# EAGLE board working (EAGLE 8.2.2)
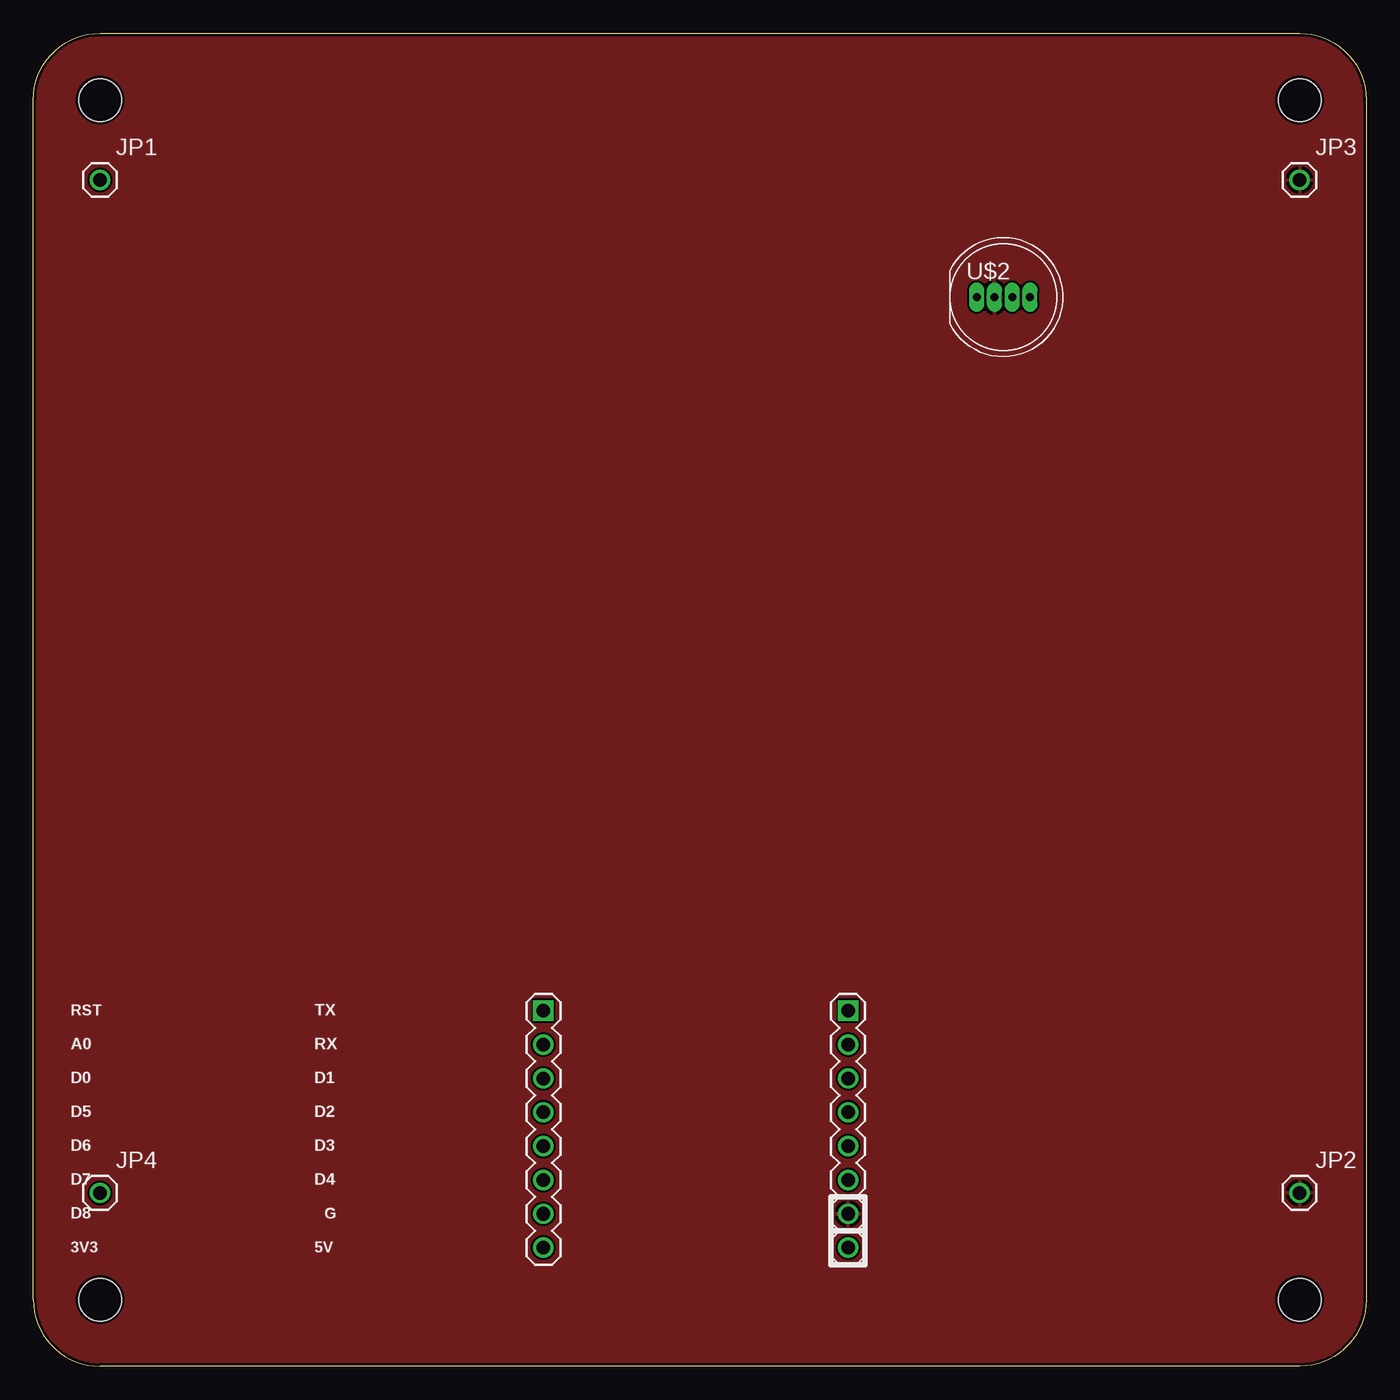
[diagram p0: board, top side]
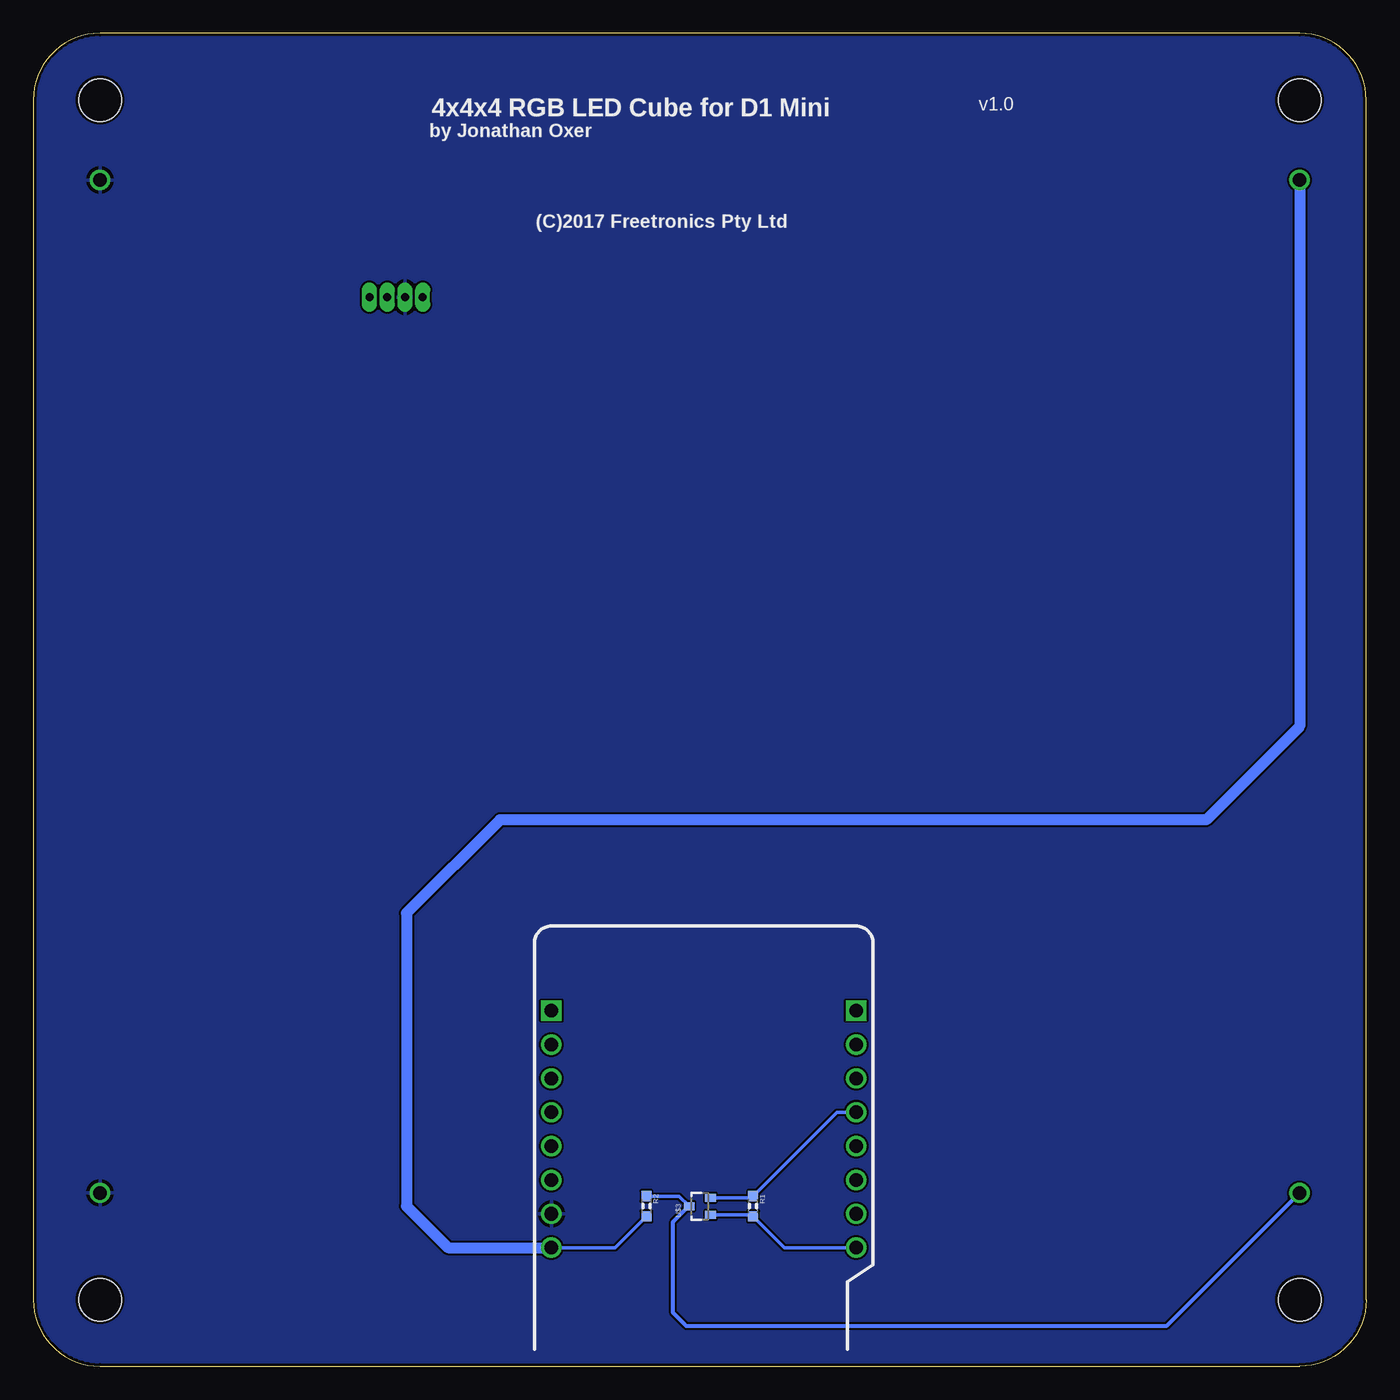
[diagram p1: board, bottom side, seen from below]

Size 100 x 100 mm. Coordinates in mm from the lower left corner, seen from the top.
Outline: 100,95 100,5 arc-90 95,0 5,0 arc-90 0,5 0,95 arc-90 5,100 95,100 arc-90 100,95
Copper layers (1*16): Top 0.035mm / dielectric 1.5mm / Bottom 0.035mm
Design rules "ElectroDragon_2layer_DRU_no_angle_20140221": minimum track width 6mil, minimum drill 12mil, track to track 6mil, track to pad 6mil, pad to pad 6mil, via to via 6mil, smd to smd 6mil, copper to edge 8mil, drill to drill 6mil, minimum pad ring 10mil, minimum via ring 6mil, stop-mask expansion 4mil, vias tented up to drill 100mil, thermal gap 10mil
Net classes: 0 default: width 0.203 mm, drill 0.356 mm, clearance 0.152 mm; 1 power: width 0.203 mm, clearance 0.152 mm
Holes 3.2 mm at 5,95 95,95 95,5 5,5

## Footprints (pad centres in the part's own frame; a part is rotated, then mirrored left to right if it is on the bottom)
1X08 = drill 1.016 square: 1 0,0 | drill 1.016: 2 2.54,0; 3 5.08,0; 4 7.62,0; 5 10.16,0; 6 12.7,0; 7 15.24,0; 8 17.78,0
1X01 = drill 1.016: 1 0,0
0603 = smd 0.762 x 0.762: 1 -0.762,0; 2 0.762,0
LED8MMRGB = drill 0.6 long: 1 -2,0; 2 -0.66,0; 3 0.66,0; 4 2,0
SOT32-3 = smd 0.6 x 0.8: 1 -0.65,-0.8; 2 0.65,-0.8; 3 0,0.8

## Placement (x,y rotation side)
H1  [1X08]  38.27,26.67 270 top
H2  [1X08]  61.13,26.67 270 top
JP1  M01PTH  [1X01]  5,89 0 top
JP2  M01PTH  [1X01]  95,13 0 top
JP3  M01PTH  [1X01]  95,89 0 top
JP4  M01PTH  [1X01]  5,13 0 top
R1  10k  [0603]  46,12 270 bottom
R2  10k  [0603]  54,12 270 bottom
U$2  APA106F8  [LED8MMRGB]  72.78,80.21 0 top
U$3  RJU003N03  [SOT32-3]  50,12 90 bottom

## Library data of the parts
H1 H2 = freetronics-original
JP1-JP4 = freetronics-master-v1.1
R1 R2 U$2 U$3 = freetronics-jon

## Nets
3.3V: H1.8 R1.2 U$3.1
5V: H2.8 JP1.1 R2.2
A0: H1.2
D0: H1.3
D1: H2.3
D2: H2.4
D3: H2.5
D4: H2.6
D5: H1.4 R1.1 U$3.2
D6: H1.5
D7: H1.6
D8: H1.7
DATA: JP4.1 R2.1 U$3.3
GND: H2.7 JP2.1 JP3.1 U$2.2
RST: H1.1
RX: H2.2
TX: H2.1
VDD: U$2.3

## Tracks (layer width: path | path; a pad name or v marks a point on that pad's centre or on a via)
3.3V
  Bottom 0.254: U$3.1 46.11,11.35 R1.2 43.65,8.89 H1.8
5V
  Bottom 0.254: R2.2 56.35,8.89 H2.8
  Bottom 0.813: JP1.1 5,48 12,41 65,41 72,34 72,12 68.89,8.89 H2.8
D5
  Bottom 0.254: U$3.2 46.11,12.65 R1.1 39.71,19.05 H1.4
DATA
  Bottom 0.254: U$3.3 50.81,12.01 51.56,12.76 R2.1
  Bottom 0.305: JP4.1 15,3 51,3 52,4 52,10.83 50.81,12.01
GND
  pour Top: 100,95 arc90 95,100 5,100 arc90 0,95 0,5 arc90 5,0 95,0 arc90 100,5
  pour Bottom: 100,5 100,95 arc90 95,100 5,100 arc90 0,95 0,5 arc90 5,0 95,0 arc90

## Text on the board
bPlace: v1.0 | 4x4x4 RGB LED Cube for D1 Mini | by Jonathan Oxer | (C)2017 Freetronics Pty Ltd
tNames: RST | TX | A0 | RX | D0 | D1 | D5 | D2 | D6 | D3 | D7 | D4 | D8 | G | 3V3 | 5V